# Altium PCB STRWL-P01-V01-PowerPlane.PcbDoc
Units mil, origin at the board's own origin, x right, y up, seen from the top; angles counter-clockwise.
Board outline 2615 x 3075 mil, 2 copper layers (Top Layer, Bottom Layer); 112 components, 76 nets, 407 pads, 112 vias.
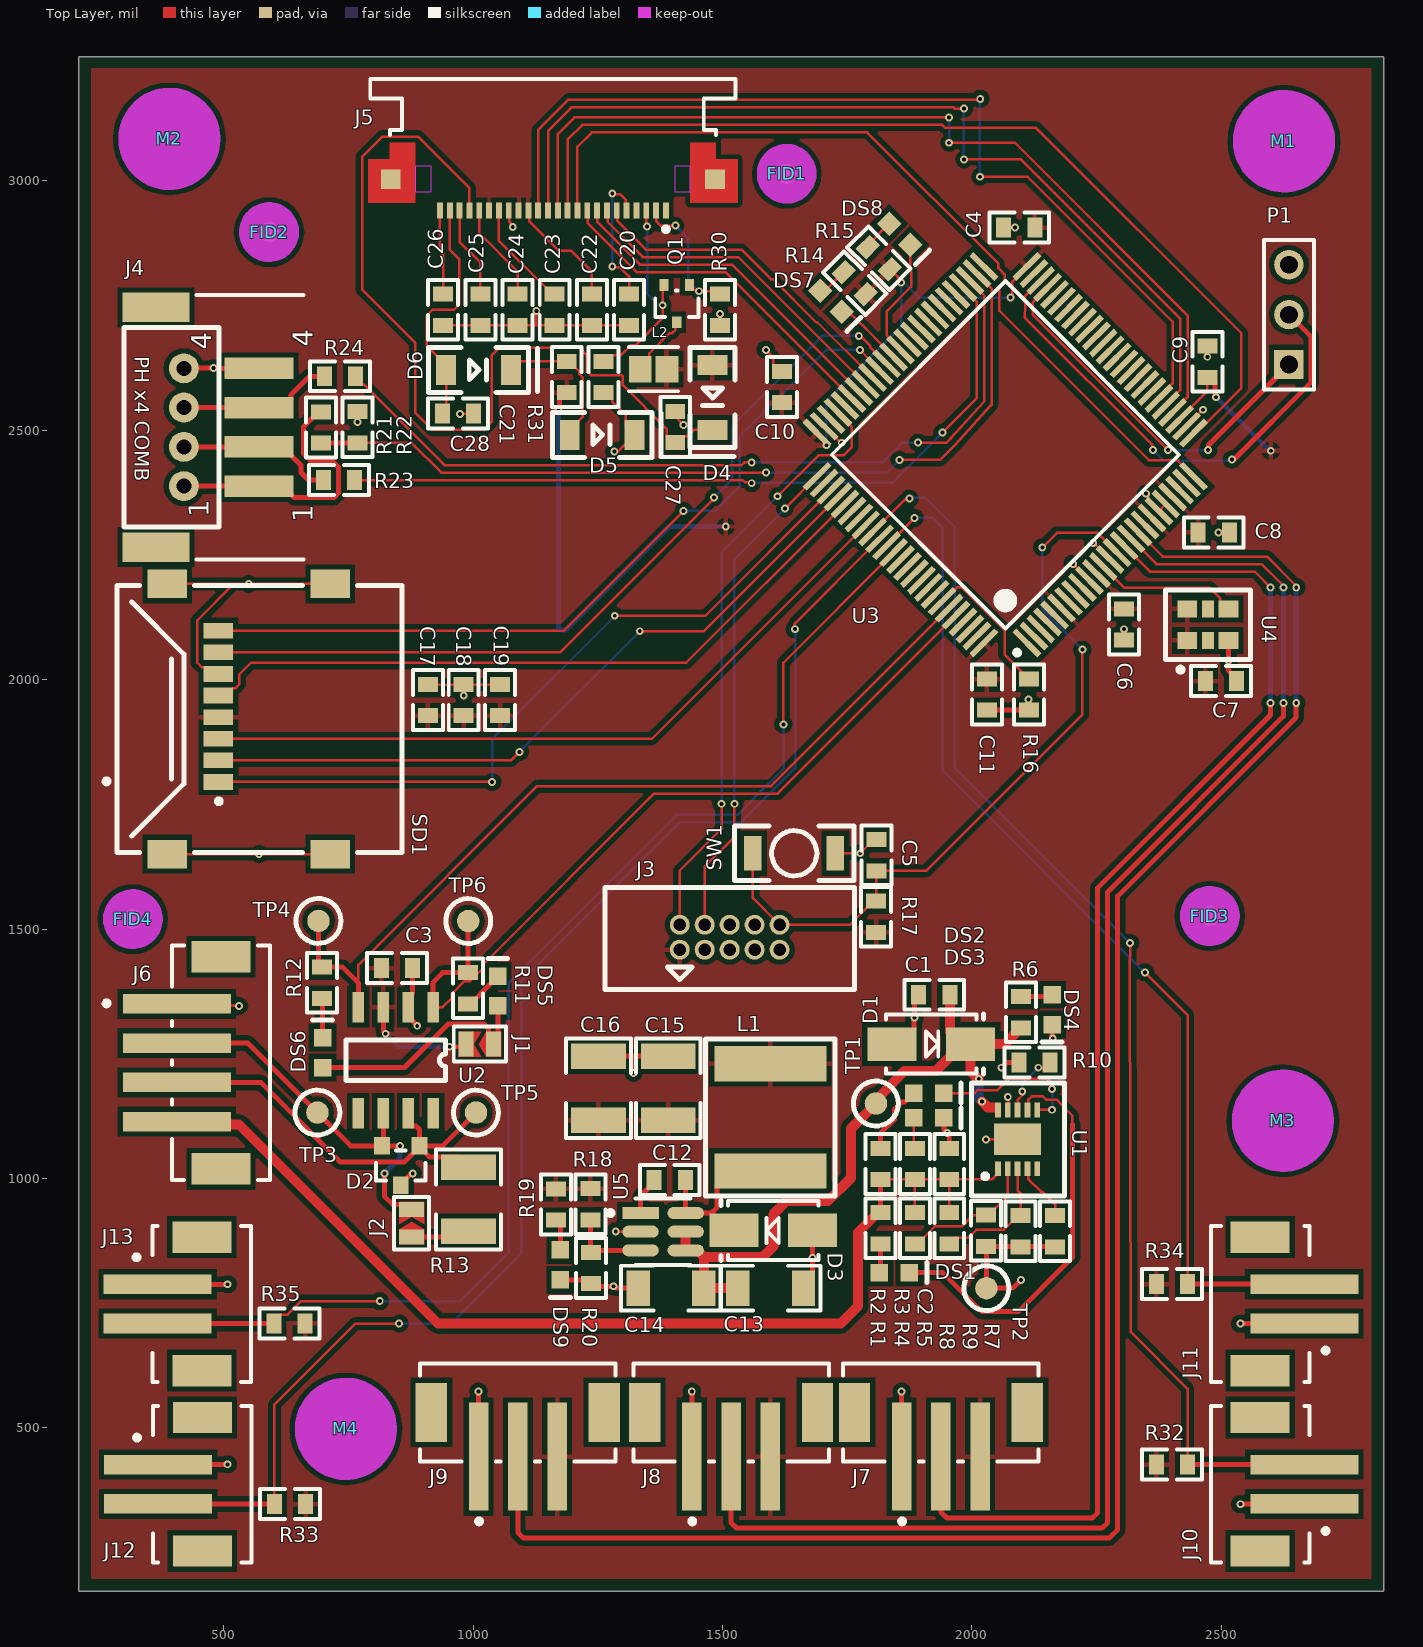
[diagram p0: Top Layer view]
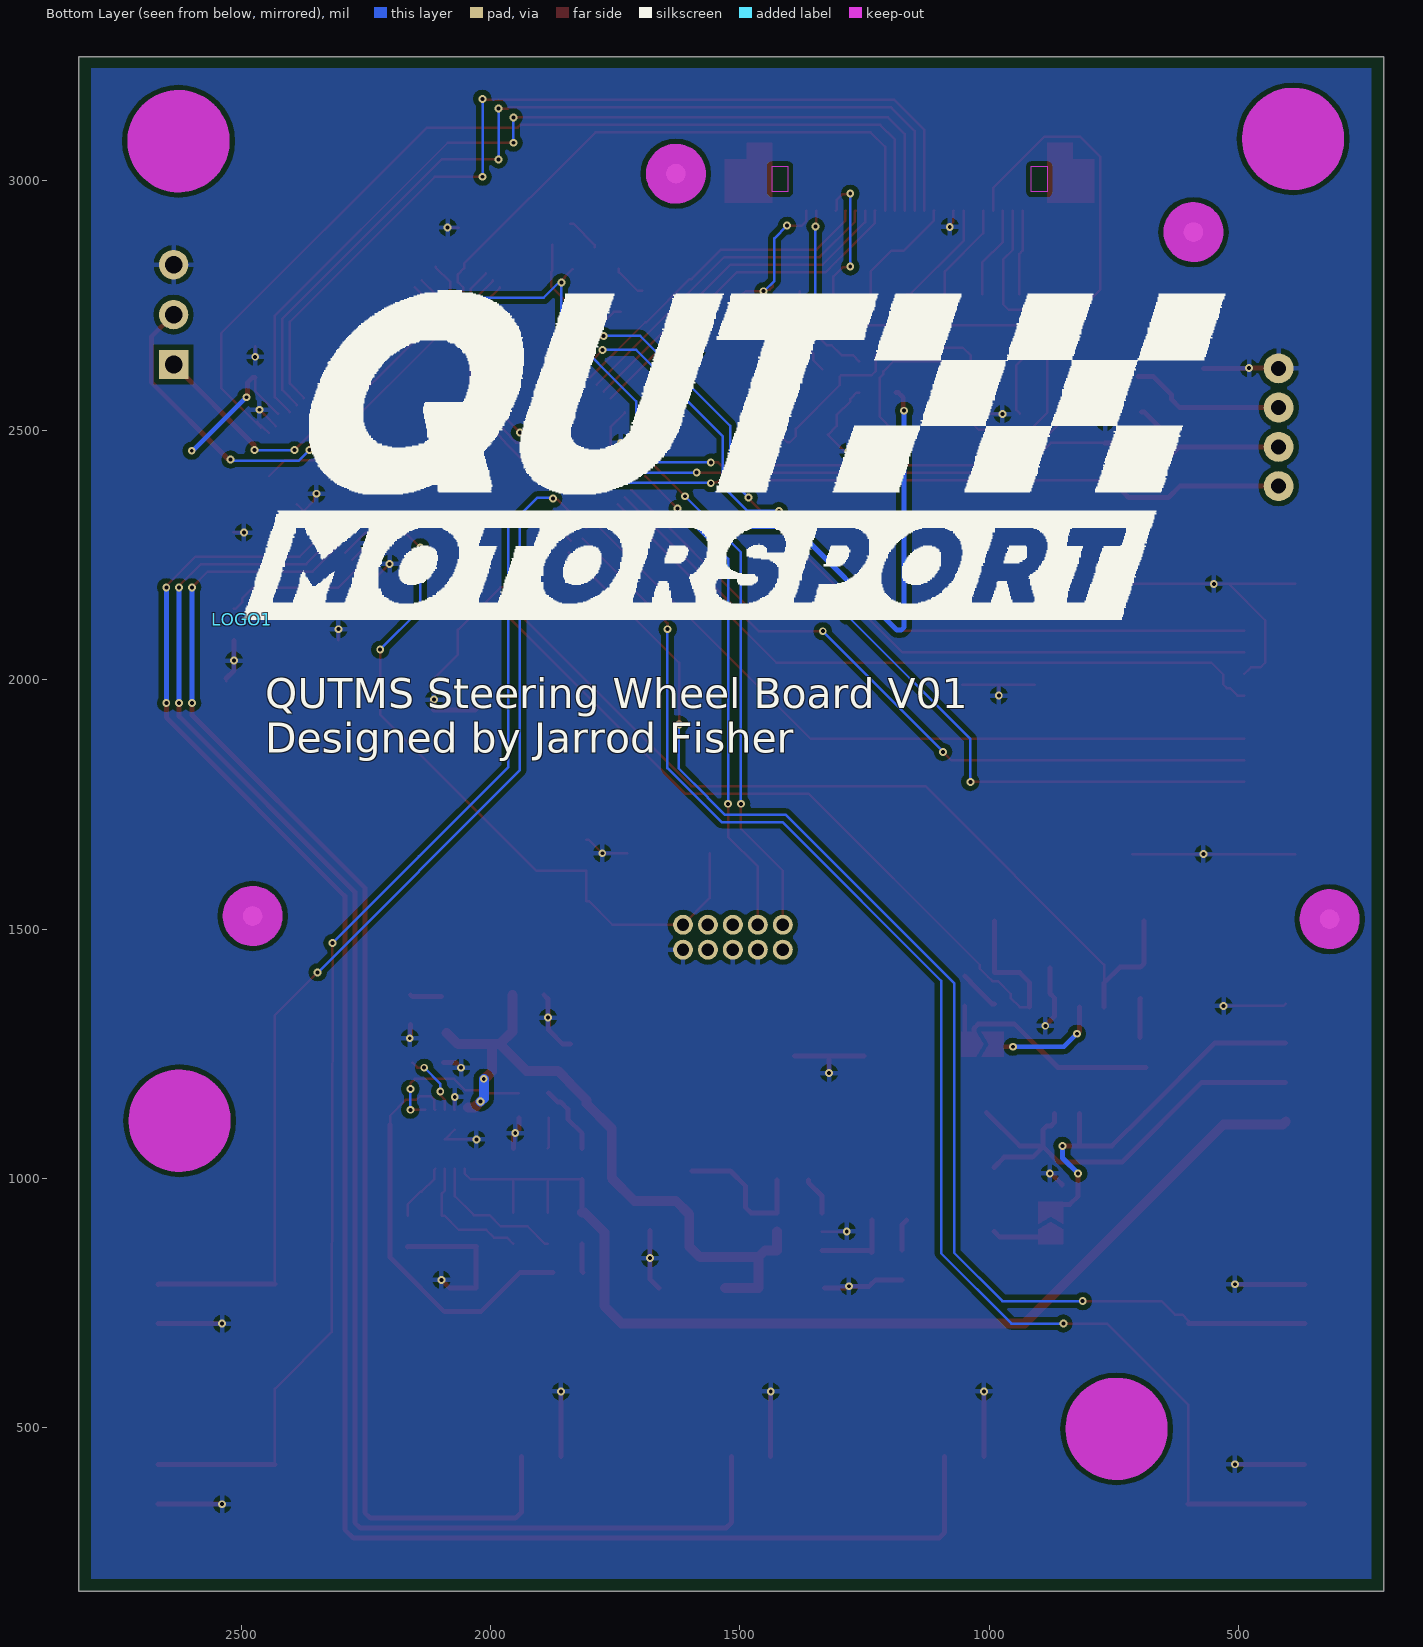
[diagram p1: Bottom Layer view, seen from below]
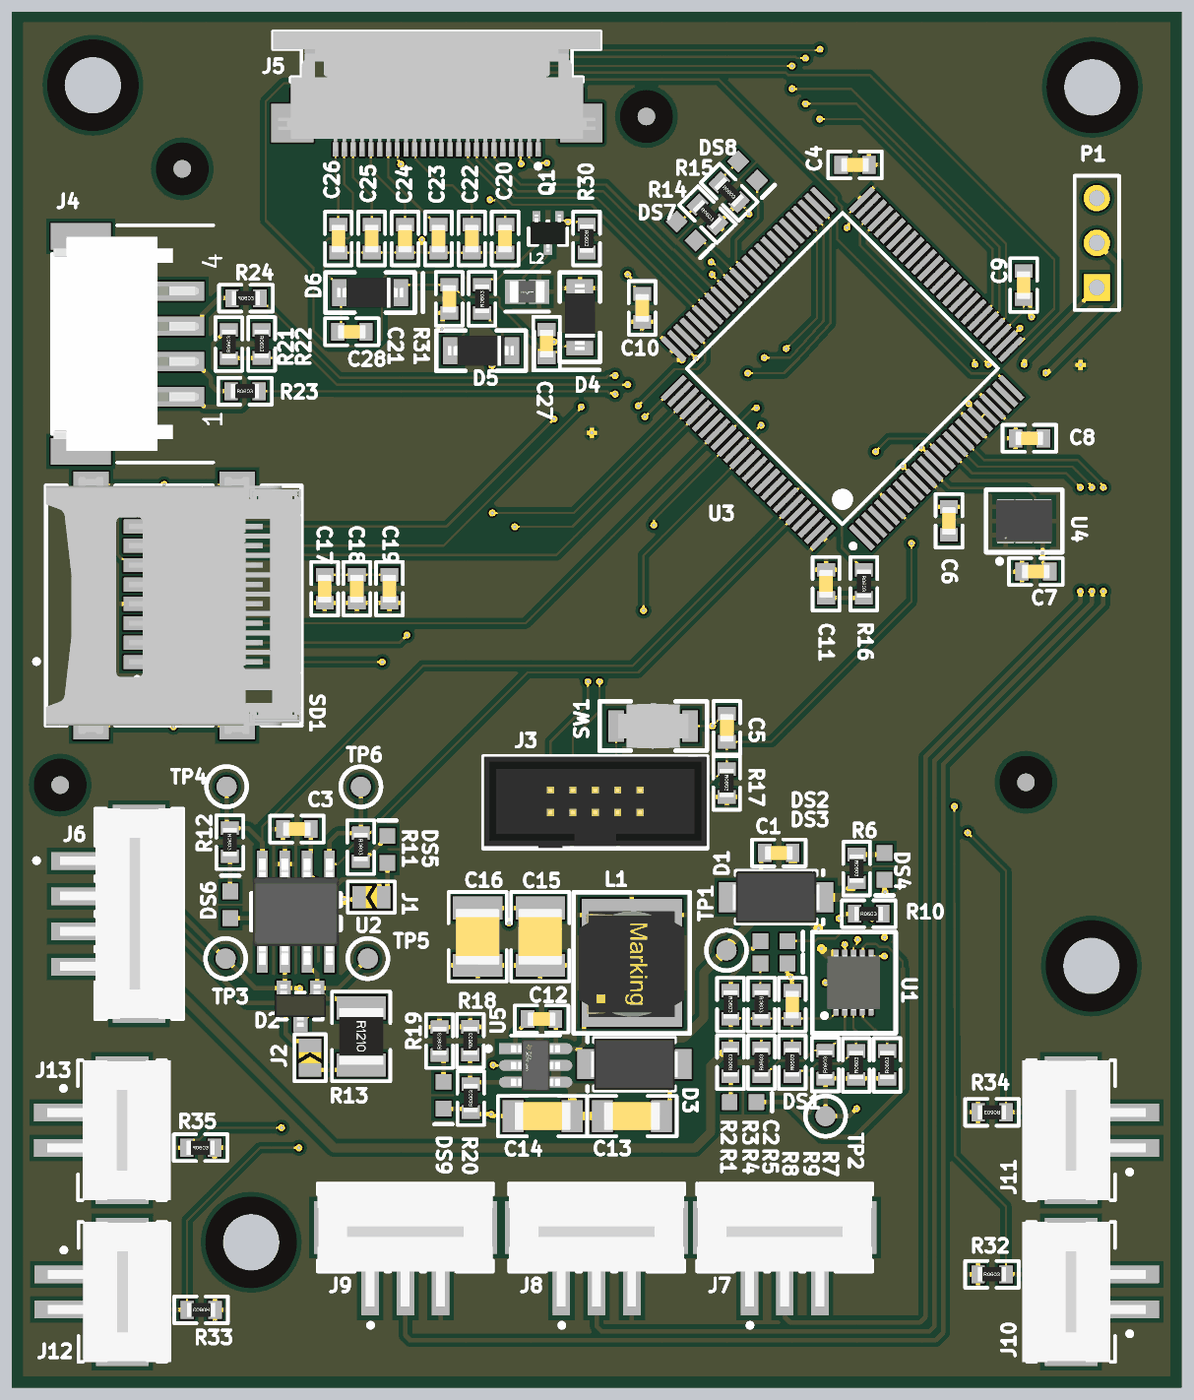
[diagram p2: 3D render of the assembled board from above, using the file's embedded part models]

## Layer stack, top to bottom
Top Solder: solder mask 0.4, Solder Resist, Dk 3.5
Top Layer: signal copper 1.4
Dielectric 1: dielectric 12.6, FR-4, Dk 4.8
Bottom Layer: signal copper 1.4
Bottom Solder: solder mask 0.4, Solder Resist, Dk 3.5

## Board outline
210,173 2825,173 2825,3248 210,3248

## Design rules (kind name [scope] priority, off if disabled: settings)
Clearance [All] p1: gap=10 ignorepadtopadclearanceinfootprint=TRUE except(0: Arc-Hole Track-Hole SMDPad-Hole THPad-Hole Via-Hole Fill-Hole Poly-Hole Region-Hole Text-Hole)
PolygonConnect [All] p1: connectstyle=Relief reliefconductorwidth=10 reliefentries=4 polygonreliefangle="90 Angle" airgapwidth=10
RoutingVias [All] p1: holewidth=7.87 width=15.75 viastyle="Through Hole" minholewidth=7.87 minwidth=15.75 maxholewidth=7.87 maxwidth=15.75
SolderMaskExpansion [All] p1: expansion=4
Width [All] p1: maxlimit=20 minlimit=5 preferedwidth=10
30 further rules are at their usual default settings.

## Classes and differential pairs
component class U_STRWL-S06-V00-Peripherals: C17 C18 C19 J4 R21 R22 R23 R24 SD1
component class U_STRWL-S05-V00-Master-PSU3V3-300mA: C12 C13 C14 C15 C16 D3 DS9 L1 R18 R19 R20 U5
component class U_STRWL-S04-V00-Microcontroller: C4 C5 C6 C7 C8 C9 C10 C11 DS7 DS8 J3 P1 R14 R15 R16 R17 SW1 U3 U4
component class U_STRWL-S03-V00-CAN_MAIN: C3 D2 DS5 DS6 J1 J2 R11 R12 R13 TP3 TP4 TP5 TP6 U2
component class U_STRWL-S02-V00-12VProtection: 2 C1 C2 D1 DS1 DS2 DS3 DS4 R1 R2 R3 R4 R5 R6 R7 R8 R9 R10 TP1 TP2 U1
component class STRWL-S01-V01-Master1: C20 C21 C22 C23 C24 C25 C26 C27 C28 D4 D5 D6 FID1 FID2 FID3 FID4 J5 J6 J7 J8 J9 J10 J11 J12 J13 L2 LOGO1 M1 M2 M3 M4 Q1 R30 R32 R33 R34 R35

## Components (designator, comment, footprint, x,y, rotation, side; value= is the part's Value field where it differs from the comment)
C1 "4u7 50V 5%" Cap_Ceramic_0603 1924.47,1368.23 r0 top
C2 "470nF 50V 5%" Cap_Ceramic_0603 1954.47,1029.23 r270 top
C3 "100nF 50V 5% X7R 0603" Cap_Ceramic_0603 847.3,1421.47 r0 top
C4 "100nF 50V 5% X7R 0603" Cap_Ceramic_0603 2094.84,2905.91 r0 top
C5 "100nF 50V 5% X7R 0603" Cap_Ceramic_0603 1808.26,1647.81 r270 top
C6 "100nF 50V 5% X7R 0603" Cap_Ceramic_0603 2304.92,2110.34 r90 top
C7 "100nF 50V 5% X7R 0603" Cap_Ceramic_0603 2499,1997 r180 top
C8 "100nF 50V 5% X7R 0603" Cap_Ceramic_0603 2484.61,2294.87 r180 top
C9 "100nF 50V 5% X7R 0603" Cap_Ceramic_0603 2471.78,2637.16 r270 top
C10 "100nF 50V 5% X7R 0603" Cap_Ceramic_0603 1619,2586.26 r270 top
C11 "4u7" Cap_Ceramic_0603 2030,1969.85 r90 top
C12 "100nF 50V 5% X7R 0603" Cap_Ceramic_0603 1394.19,997 r0 top
C13 "22uF 35V" Cap_Ceramic_1206 1596.19,780 r0 top
C14 "22uF 35V" Cap_Ceramic_1206 1396.72,780 r180 top
C15 "47uF 16V 1210" Cap_Ceramic_1210 1391.19,1181 r270 top
C16 "47uF 16V 1210" Cap_Ceramic_1210 1251.19,1181 r270 top
C17 "4u7" Cap_Ceramic_0603 909.44,1958.82 r270 top
C18 "1uF" Cap_Ceramic_0603 981.2,1958.82 r270 top
C19 "100nF 50V 5% X7R 0603" Cap_Ceramic_0603 1054.07,1958.82 r270 top
C20 "1uF 25V 5% X7R 0603" Cap_Ceramic_0603 1312.7,2741.31 r90 top
C21 "4u7 50V 5% X7R 0603" Cap_Ceramic_0603 1187.73,2606.5 r270 top
C22 "1uF 25V 5% X7R 0603" Cap_Ceramic_0603 1238.16,2741.31 r90 top
C23 "1uF 25V 5% X7R 0603" Cap_Ceramic_0603 1163.62,2741.31 r90 top
C24 "1uF 25V 5% X7R 0603" Cap_Ceramic_0603 1089.08,2741.31 r90 top
C25 "1uF 25V 5% X7R 0603" Cap_Ceramic_0603 1014.54,2741.31 r90 top
C26 "1uF 25V 5% X7R 0603" Cap_Ceramic_0603 940,2741.31 r90 top
C27 "1uF 25V 5% X7R 0603" Cap_Ceramic_0603 1405.27,2506.5 r270 top
C28 "1uF 25V 5% X7R 0603" Cap_Ceramic_0603 970,2533 r180 top
D1 "1N4448WQ-7-F" SMA 1918.47,1269.23 r0 top
D2 "NUP2105L" NUP2105L 855,1026 r180 top
D3 "B260A-13-F" SMA 1601.72,896 r180 top
D4 "STPS0530Z" SOD123 1479.78,2565.5 r270 top
D5 "STPS0530Z" SOD123 1258.73,2490.62 r0 top
D6 "STPS0530Z" SOD123 1011,2620.5 r0 top
DS1 "LED Red 0603" "LED RED 0603" 1844.47,811.23 r0 top
DS2 "LED Red 0603" "LED RED 0603" 1913.47,1171.23 r0 top
DS3 "LED Green 0603" "LED GREEN 0603" 1913.47,1121.23 r0 top
DS4 "LED Green 0603" "LED GREEN 0603" 2160.7,1338.23 r270 top
DS5 "LED Blue 0603" "LED BLUE 0603" 1049.46,1375.76 r90 top
DS6 "LED Blue 0603" "LED BLUE 0603" 698.38,1252.29 r90 top
DS7 "LED Orange" "LED ORANGE 0603" 1717.49,2758.12 r315 top
DS8 "LED Orange" "LED ORANGE 0603" 1855.1,2892.62 r315 top
DS9 "LED Green 0603" "LED GREEN 0603" 1174.96,826.76 r270 top
FID1 "Fiducial 1MM" "FIDUCIAL 1MM" 1628.5,3014.02 r0 top
FID2 "Fiducial 1MM" "FIDUCIAL 1MM" 591,2897 r90 top
FID3 "Fiducial 1MM" "FIDUCIAL 1MM" 2476.89,1526 r90 top
FID4 "Fiducial 1MM" "FIDUCIAL 1MM" 318,1519.78 r90 top
J1 "Jumper 2Way Solderable" Jumper_2Way_Solderable 1041.22,1269.37 r90 top
J2 "Jumper 2Way Solderable" Jumper_2Way_Solderable 876.73,883 r0 top
J3 "IDC 10P 2x5 1.27mm" "IDC 1.27MM 10P" 1514.23,1483.52 r0 top
J4 "JST PH 4x RIGHT COMB" "JST PH 4x RIGHT COMB" 305.28,2505.84 r90 top
J5 "52437-2471" MOLX-52437-2471 1160,2971.73 r180 top locked
J6 "JST PH 4 Way VERT SMD" "JST 4P VERT SMD" 494.58,1230.91 r270 top
J7 "JST PH 3 Way VERT SMD" "JST 3P VERT SMD" 1937.73,531.06 r0 top
J8 "JST PH 3 Way VERT SMD" "JST 3P VERT SMD" 1517.14,531.06 r0 top
J9 "JST PH 3 Way VERT SMD" "JST 3P VERT SMD" 1089.73,531.06 r0 top
J10 "JSP PH 2 Way VERT SMD" "JST 2P VERT SMD" 2627,387 r270 top
J11 "JSP PH 2 Way VERT SMD" "JST 2P VERT SMD" 2627,748.51 r270 top
J12 "JSP PH 2 Way VERT SMD" "JST 2P VERT SMD" 407.98,387 r90 top
J13 "JSP PH 2 Way VERT SMD" "JST 2P VERT SMD" 406.98,748.51 r90 top
L1 "74404064221" Inductor_6x6mm 1595.72,1120 r90 top
L2 "LQM21FN100M70L" Murata_LQM21FN_70_IPC_C 1361.93,2622.27 r180 top
LOGO1 "50mm Wide QUTMS Logo" "QUTMS LOGO 50MM" 2497.29,2120 r180 bottom
M1 "Hole M3 Tight Unplated" "M3.2 UNPLATED" 2625.36,3079.17 r0 top
M2 "Hole M3 Tight Unplated" "M3.2 UNPLATED" 391.2,3083.86 r0 top
M3 "Hole M3 Tight Unplated" "M3.2 UNPLATED" 2623.25,1115.65 r0 top
M4 "Hole M3 Tight Unplated" "M3.2 UNPLATED" 745,498 r0 top
P1 "Header 3" HDR1X3 2635.36,2631.57 r90 top
Q1 "MOSFET N-CH 30V 4A SOT323" Diodes_SOT323_0 1408.4,2753.46 r180 top
R1 "4k7 5% 0603" Res_ThinFilm_0603 1816.47,900.23 r90 top
R2 "4k7 5% 0603" Res_ThinFilm_0603 1816.47,1029.23 r270 top
R3 "4k7 5% 0603" Res_ThinFilm_0603 1885.47,1029.17 r270 top
R4 "2M2 1%" Res_ThinFilm_0603 1885.47,900.23 r90 top
R5 "2M2 1%" Res_ThinFilm_0603 1954.47,900.23 r90 top
R6 "4k7 5% 0603" Res_ThinFilm_0603 2098.47,1333.23 r270 top
R7 "150k 5% 0603" Res_ThinFilm_0603 2166.47,894.23 r90 top
R8 "390k 5%" Res_ThinFilm_0603 2028.47,895.23 r90 top
R9 "240k 5%" Res_ThinFilm_0603 2097.47,894.23 r90 top
R10 "1k 5% 0603" Res_ThinFilm_0603 2125.47,1232.23 r0 top
R11 "330R" Res_ThinFilm_0603 990,1381.24 r270 top
R12 "330R" Res_ThinFilm_0603 697.19,1392.24 r270 top
R13 "120R 1% 1210" Res_ThinFilm_1210 991,958 r270 top
R14 "330R" Res_ThinFilm_0603 1764.97,2794.88 r315 top
R15 "330R" Res_ThinFilm_0603 1813.5,2844.77 r315 top
R16 "10k 1% 0603" Res_ThinFilm_0603 2114.56,1969.85 r270 top
R17 "4k7" Res_ThinFilm_0603 1808.02,1524.52 r270 top
R18 "64k9 1%" Res_ThinFilm_0603 1234.96,948.24 r90 top
R19 "1k" Res_ThinFilm_0603 1165.96,947.87 r90 top
R20 "19k6 1%" Res_ThinFilm_0603 1235.96,820.24 r90 top
R21 "10k 5% 0603" Res_ThinFilm_0603 695,2505.5 r90 top
R22 "15k 5% 0603" Res_ThinFilm_0603 768.47,2505.76 r270 top
R23 "22R" Res_ThinFilm_0603 731.24,2400 r0 top
R24 "22R" Res_ThinFilm_0603 733.24,2608 r0 top
R30 "10k 1% 0603" Res_ThinFilm_0603 1494.78,2741.31 r270 top
R31 "0R47 5% 0603" Res_ThinFilm_0603 1261.11,2606.5 r90 top
R32 "10k 5% 0603" Res_ThinFilm_0603 2401,426.37 r0 top
R33 "10k 5% 0603" Res_ThinFilm_0603 633,347 r180 top
R34 "10k 5% 0603" Res_ThinFilm_0603 2401,788.39 r180 top
R35 "10k 5% 0603" Res_ThinFilm_0603 632,709.51 r0 top
SD1 "47219-2001" 47219-2001 550.25,1921 r90 top
SW1 "B3U-1000P" "BTN B3U-1000P" 1643.66,1651.81 r180 top
TP1 "TestPoint" TestPointSMD 1807.47,1150.23 r270 top
TP2 "TestPoint" TestPointSMD 2028.92,779.99 r90 top
TP3 "TestPoint_SMD" TestPointSMD 687.93,1132 r90 top
TP4 "TestPoint_SMD" TestPointSMD 690.1,1516.29 r90 top
TP5 "TestPoint_SMD" TestPointSMD 1005.86,1132 r90 top
TP6 "TestPoint_SMD" TestPointSMD 990.19,1516 r90 top
U1 "MAX17612A" MAX17612A 2091.47,1078.23 r90 top
U2 "SN65HVD233" SN65HVD233DR 845,1237 r270 top
U3 "STM32F207VGT7" STM-LQFP100_N 2066.9,2450.74 r135 top
U4 "DSC1101CI5-020.0000T" VDFN6_3P2X2P5_MCH 2473,2110 r90 top
U5 "LMR14010ADDCR" Texas_Instruments_DDC0006A_IPC_A 1380.96,893.24 r0 top

## Footprints (in the part's own frame and the unit in brackets; to place one, negate y for a bottom-side part, rotate by r counter-clockwise, add the part's x,y. Pads: shape width x height; smd on the part's side, far side on the other; paste and mask are expansions set on the pad)
47219-2001 [mm]
  rect 0.8x1.5 smd: 1(-3.205,1.55) 2(-2.105,1.55) 3(-1.005,1.55) 4(0.095,1.55) 5(1.195,1.55) 6(2.295,1.55) 7(3.395,1.55) 8(4.495,1.55)
  rect 1.45x2 smd: 9(6.875,4.15) 10(6.875,-4.15) 11(-6.875,-4.15) 12(-6.875,4.15)
  silkscreen extent -6.8,-7.8 6.8,7.36, body extent -7.3,-7.79 7.3,6.71, height 1.91
"BTN B3U-1000P" [mil] "OMRON B3U-1000P"
  rect 35x70 smd: 1(-82.68,0) 2(82.68,0)
  silkscreen extent -120,-55 120,55, body extent -79,-49 79,49, height 63
Cap_Ceramic_0603 [mil]
  rect 30x40 smd: 1(-31.24,0) 2(31.24,0)
  silkscreen extent -60,-30 60,30, body extent -31,-16 32,16, height 33
Cap_Ceramic_1206 [mil]
  rect 47x71 smd: 1(-66.08,0) 2(66.08,0)
  silkscreen extent -100,-45 100,45, body extent -63,-31 63,32, height 53
Cap_Ceramic_1210 [mm]
  rect 1.3x2.8 smd: 1(-1.625,0) 2(1.625,0)
  silkscreen extent -2.54,-1.65 2.54,1.65, body extent -1.6,-1.25 1.6,1.25, height 1.35
Diodes_SOT323_0 [mm]
  rect 0.47x0.6 smd paste+0 mask+0: 1(0,0.95) 2(-0.65,-0.95) 3(0.65,-0.95)
  silkscreen extent -1.1,-0.67 1.1,0.67, body extent -1.35,-1.2 1.35,1.2, height 0.25
"FIDUCIAL 1MM" [mm]
  round 1 smd mask+1: 1(0,0)
  round 1 smd far side mask+1: 1(0,0)
  Keep-Out Layer circle w1.524: c0,0 r0.762
HDR1X3 [mm] "Connector; Header; 3 Position"
  rect 1.5x1.5 hole 0.9: 1(0,0)
  round 1.5 hole 0.9: 2(2.54,0) 3(5.08,0)
  silkscreen extent -1.27,-1.27 6.35,1.27
"IDC 1.27MM 10P" [mil]
  round 40 hole 25: 1(-100,-25) 2(-100,25) 3(-50,-25) 4(-50,25) 5(0,-25) 6(0,25) 7(50,-25) 8(50,25) 9(100,-25) 10(100,25)
  silkscreen extent -250,-105 250,100, body extent -249,-104 249,100, height 214
Inductor_6x6mm [mm]
  rect 1.8x5.7 smd: 1(-2.667,0) 2(2.794,0)
  silkscreen extent -3.94,-3.3 4.06,3.3, body extent -3,-3 3,3, height 4.56
"JST 2P VERT SMD" [mm]
  rect 1x5.5 smd paste+0 mask+0: 1(1,1) 2(-1,1)
  rect 1.6x3 smd paste+0 mask+0: 3(3.4,-1.25) 4(-3.4,-1.25)
  silkscreen extent -3.98,-3.75 3.98,2.2, body extent -4.3,-3.85 4.3,3.85, height 0.25
"JST 3P VERT SMD" [mm]
  rect 1x5.5 smd paste+0 mask+0: 1(-2,-2.25) 2(0,-2.25) 3(2,-2.25)
  rect 1.6x3 smd paste+0 mask+0: 4(-4.4,0) 5(4.4,0)
  silkscreen extent -4.97,-5.67 4.97,2.5, body extent -5.3,-5.1 5.3,2.6, height 0.25
"JST 4P VERT SMD" [mm]
  rect 1x5.5 smd paste+0 mask+0: 1(-3.025,-2.25) 2(-1.025,-2.25) 3(0.975,-2.25) 4(2.975,-2.25)
  rect 1.6x3 smd paste+0 mask+0: 5(-5.425,0) 6(5.375,0)
  silkscreen extent -6,-5.95 5.95,2.5, body extent -6.32,-5.1 6.27,2.6, height 0.25
"JST PH 4x RIGHT COMB" [mm]
  round 1.524 hole 0.762: 1(-3,-2.921) 2(-1,-2.921) 3(1,-2.921) 4(3,-2.921)
  rect 1.1x3.5 smd: 1(-3,-6.75) 2(-1,-6.75) 3(1,-6.75) 4(3,-6.75)
  rect 1.5x3.4 smd: M(-6.1,-1.5) M(6.1,-1.5)
  silkscreen extent -6.73,-9.02 6.73,0.13, body extent -6.07,-8.2 6.07,0.06, height 5.89
Jumper_2Way_Solderable [mil]
  rect 50x30 smd: 1(0,55) 2(0,0)
  Top Layer region: -25,15 0,30 25,15 25,-15 0,-15 -25,-15
  Top Layer region: -25,25 0,40 25,25 25,70 -25,70
  silkscreen extent -35,-25 35,80
"LED BLUE 0603" [mil]
  rect 35x35 smd: 1(-30,0) 2(30,0)
  silkscreen extent 65,-20 65,20, body extent -40,-20 40,20, height 30
"LED GREEN 0603" [mil]
  rect 35x35 smd: 1(-30,0) 2(30,0)
  silkscreen extent 65,-20 65,20, body extent -40,-20 40,20, height 30
"LED ORANGE 0603" [mil]
  rect 35x35 smd: 1(-30,0) 2(30,0)
  silkscreen extent 65,-20 65,20, body extent -40,-20 40,20, height 30
"LED RED 0603" [mil]
  rect 35x35 smd: 1(-30,0) 2(30,0)
  silkscreen extent 65,-20 65,20, body extent -40,-20 40,20, height 30
"M3.2 UNPLATED" [mm]
  round 0 hole 3.2 unplated mask+2.6: 1(0,0)
  Keep-Out Layer circle w2.667: c0,0 r1.27
MAX17612A [mm]
  rect 0.75x0.3 smd: 1(-1.5,1) 2(-1.5,0.5) 3(-1.5,0) 4(-1.5,-0.5) 5(-1.5,-1) 6(1.5,-1) 7(1.5,-0.5) 8(1.5,0) 9(1.5,0.5) 10(1.5,1)
  rect 1.6x2.4 smd: 11(0,0)
  silkscreen extent -2.87,-2.4 2.87,2.35, body extent -1.55,-1.5 1.55,1.5, height 0.8
MOLX-52437-2471 [mm] "FPC Connector, 24-Leads, Right Angle, Pitch 0.5 mm, SMT"
  rect 0.3x0.8 smd: 1(-5.75,0.8) 2(-5.25,0.8) 3(-4.75,0.8) 4(-4.25,0.8) 5(-3.75,0.8) 6(-3.25,0.8) 7(-2.75,0.8) 8(-2.25,0.8) 9(-1.75,0.8) 10(-1.25,0.8) 11(-0.75,0.8) 12(-0.25,0.8) 13(0.25,0.8) 14(0.75,0.8) 15(1.25,0.8) 16(1.75,0.8) 17(2.25,0.8) 18(2.75,0.8) 19(3.25,0.8) 20(3.75,0.8) 21(4.25,0.8) 22(4.75,0.8) 23(5.25,0.8) 24(5.75,0.8)
  rect 1x1 smd: MP1(-8.25,-0.8) MP2(8.25,-0.8)
  Top Layer region: -7,0.4 -9.4,0.4 -9.4,-1.8 -8.3,-1.8 -8.3,-2.65 -7,-2.65
  Top Layer region: 7,0.4 9.4,0.4 9.4,-1.8 8.3,-1.8 8.3,-2.65 7,-2.65
  Keep-Out Layer region: -6.2,-0.15 -7,-0.15 -7,-1.45 -6.2,-1.45
  Keep-Out Layer region: 6.2,-1.45 7,-1.45 7,-0.15 6.2,-0.15
  silkscreen extent -9.3,-5.9 9.3,1.87, body extent -9.3,-5.9 9.3,0.9, height 2.05
Murata_LQM21FN_70_IPC_C [mil]
  rect 45.45x53.39 smd paste+0 mask+0: 1(-26.61,0) 2(26.61,0)
  silkscreen extent -49,-44 49,44, body extent -53,-32 53,32, height 10
NUP2105L [mm]
  rect 0.8x0.9 smd: 1(-0.95,-1) 2(0.95,-1) 3(0,1)
  silkscreen extent -1.27,-0.76 1.27,0.76, body extent -1.45,-1.22 1.45,1.18, height 1
"QUTMS LOGO 50MM" [mil]
  silkscreen extent 0,0 1970,660
Res_ThinFilm_0603 [mil]
  rect 30x40 smd: 1(-31.24,0) 2(31.24,0)
  silkscreen extent -60,-30 60,30, body extent -31,-16 32,16, height 18
Res_ThinFilm_1210 [mm]
  rect 1.3x2.8 smd: 1(-1.625,0) 2(1.625,0)
  silkscreen extent -2.54,-1.65 2.54,1.65, body extent -1.6,-1.25 1.6,1.25, height 0.6
SMA [mm]
  rect 2.5x1.7 smd: A(-2,0) K(2,0)
  silkscreen extent -2.3,-1.52 2.67,1.52, body extent -2.52,-1.46 2.52,1.46, height 2.4
SN65HVD233DR [mm]
  rect 1.55x0.6 smd: 1(-2.7,1.903) 2(-2.7,0.633) 3(-2.7,-0.637) 4(-2.7,-1.907) 5(2.7,-1.907) 6(2.7,-0.637) 7(2.7,0.633) 8(2.7,1.903)
  silkscreen extent -1.04,-2.54 1.04,2.54, body extent -3.01,-2.45 3.01,2.45, height 1.63
SOD123 [mil]
  rect 40x60 smd: A(-65,0) K(65,0)
  silkscreen extent -100,-45 118,45, body extent -74,-33 74,33, height 47
STM-LQFP100_N [mm] "Thin QFP, 100-Leads, Body 14x14mm, Pitch 0.5mm, IPC Medium Density"
  rect 1.8x0.3 smd: 1(-7.55,6) 2(-7.55,5.5) 3(-7.55,5) 4(-7.55,4.5) 5(-7.55,4) 6(-7.55,3.5) 7(-7.55,3) 8(-7.55,2.5) 9(-7.55,2) 10(-7.55,1.5) 11(-7.55,1) 12(-7.55,0.5) 13(-7.55,0) 14(-7.55,-0.5) 15(-7.55,-1) 16(-7.55,-1.5) 17(-7.55,-2) 18(-7.55,-2.5) 19(-7.55,-3) 20(-7.55,-3.5) 21(-7.55,-4) 22(-7.55,-4.5) 23(-7.55,-5) 24(-7.55,-5.5) 25(-7.55,-6) 51(7.55,-6) 52(7.55,-5.5) 53(7.55,-5) 54(7.55,-4.5) 55(7.55,-4) 56(7.55,-3.5) 57(7.55,-3) 58(7.55,-2.5) 59(7.55,-2) 60(7.55,-1.5) 61(7.55,-1) 62(7.55,-0.5) 63(7.55,0) 64(7.55,0.5) 65(7.55,1) 66(7.55,1.5) 67(7.55,2) 68(7.55,2.5) 69(7.55,3) 70(7.55,3.5) 71(7.55,4) 72(7.55,4.5) 73(7.55,5) 74(7.55,5.5) 75(7.55,6)
  rect 0.3x1.8 smd: 26(-6,-7.55) 27(-5.5,-7.55) 28(-5,-7.55) 29(-4.5,-7.55) 30(-4,-7.55) 31(-3.5,-7.55) 32(-3,-7.55) 33(-2.5,-7.55) 34(-2,-7.55) 35(-1.5,-7.55) 36(-1,-7.55) 37(-0.5,-7.55) 38(0,-7.55) 39(0.5,-7.55) 40(1,-7.55) 41(1.5,-7.55) 42(2,-7.55) 43(2.5,-7.55) 44(3,-7.55) 45(3.5,-7.55) 46(4,-7.55) 47(4.5,-7.55) 48(5,-7.55) 49(5.5,-7.55) 50(6,-7.55) 76(6,7.55) 77(5.5,7.55) 78(5,7.55) 79(4.5,7.55) 80(4,7.55) 81(3.5,7.55) 82(3,7.55) 83(2.5,7.55) 84(2,7.55) 85(1.5,7.55) 86(1,7.55) 87(0.5,7.55) 88(0,7.55) 89(-0.5,7.55) 90(-1,7.55) 91(-1.5,7.55) 92(-2,7.55) 93(-2.5,7.55) 94(-3,7.55) 95(-3.5,7.55) 96(-4,7.55) 97(-4.5,7.55) 98(-5,7.55) 99(-5.5,7.55) 100(-6,7.55)
  silkscreen extent -7.67,-6.25 6.25,6.82, body extent -7,-7 7,7, height 1.6
TestPointSMD [mil]
  round 45 smd: 1(0,0)
  silkscreen extent -45,-45 45,45
Texas_Instruments_DDC0006A_IPC_A [mm]
  rect 1.854x0.612 smd paste+0 mask+0: 1(-1.15,0.95)
  rrect100% 1.854x0.612 smd paste+0 mask+0: 2(-1.15,0) 3(-1.15,-0.95) 4(1.15,-0.95) 5(1.15,0) 6(1.15,0.95)
  silkscreen extent -2.8,-1.7 1.4,1.7, body extent -2.58,-1.95 2.58,1.95, height 0.25
VDFN6_3P2X2P5_MCH [mm]
  rect 0.85x1 smd paste-0.425 mask+0: 1(-0.8,1.05) 3(-0.8,-1.05) 4(0.8,-1.05) 6(0.8,1.05)
  rect 0.85x0.6 smd paste+0 mask+0: 2(-0.8,0) 5(0.8,0)
  silkscreen extent -2.41,-2.16 1.78,2.16, body extent -1.25,-1.6 1.25,1.6, height 0.65

## Part data
C1 C11 C17: library part "4u7 50V 5% X7R 0603", "Capacitor, Ceramic, SMD, 4u7, 50V, 5%, X7R, 0603"
C2: library part "470nF 50V 5% X7R 0603", "Capacitor, Ceramic, SMD, 470nF, 50V, 5%, X7R, 0603"
C3 C4 C5 C6 C7 C8 C9 C10 C12 C19: "Capacitor, Ceramic, SMD, 100nF, 50V, 5%, X7R, 0603"
C13 C14: library part "22uF 35V 20% X5R 1206", "22µF ±20% 35V Ceramic Capacitor X5R 1206 (3216 Metric)", ComponentLink1Description=Digikey, ComponentLink1URL=https://www.digikey.com.au/product-detail/en/tdk-corporation/C3216X5R1V226M160AC/445-8045-1-ND/2792165, ComponentLink2Description=Datasheet, ComponentLink2URL=https://product.tdk.com/info/en/catalog/datasheets/mlcc_commercial_general_en.pdf
C15 C16: library part "47uF 16V 10% X7R 1210", "Capacitor, Ceramic, SMD, 47uF, 16V, 5%, X7R, 1210"
C18: library part "1uF 25V 5% X7R 0603", "Capacitor, Ceramic, SMD, 1uF, 25V, 5%, X7R, 0603"
C20 C22 C23 C24 C25 C26 C27 C28: "Capacitor, Ceramic, SMD, 1uF, 25V, 5%, X7R, 0603"
C21: "Capacitor, Ceramic, SMD, 4u7, 50V, 5%, X7R, 0603"
D1: "Diode, SMD, 75V, 5%, 250mA, SOD123", Average Rectified Current=150mA, Forward Voltage=1V, Manufacturer="ON Semiconductor / Fairchild", Manufacturer Part Number=1N914BWS, Max Forward Surge Current (Ifsm)=4A, Max Operating Temperature=150°C, Max Repetitive Reverse Voltage (Vrrm)=75V, Max Reverse Leakage Current=5uA, Min Operating Temperature=-55°C, Package Quantity=1, Power Dissipation=200mW, Category="Rectifier Diodes", Contact Plating=Tin,Matte, Element Configuration=Single, Forward Current=150mA, Height=1mm, Lead Free="Lead Free", Length=1.8mm, Max Reverse Voltage (DC)=75V, Mount="Surface Mount", Number of Pins=2, Packaging="Tape and Reel", Peak Reverse Current=5uA, Radiation Hardening=No, REACH SVHC="No SVHC", Recovery Time=4ns, Reverse Recovery Time=4ns, Reverse Voltage=75V, Weight=0.0276g, Width=1.35mm
D3: "Diode, Schottky Barrier Rectifier, 60 V, 2 A, B260A-13-F"
D4 D5 D6: "Diode, Schottky Barrier Rectifier, 30 V, 0.5 A, STPS0530Z"
DS5 DS6: library part "LED BLUE 0603"
DS7 DS8: library part "LED ORANGE 0603"
J1 J2: library part "Jumper 2Way Side Solderable", "Jumper 2Way Side Solderable"
J5: "0.5 mm Pitch Easy-On(TM) Type FPC Connector, Right Angle, ZIF, SMT, Bottom Contact, 24 Circuits, -40 to 85 degC, ELV and RoHS Compliant, Tape and Reel", Current (Max per Contact)=0.5A, Manufacturer=Molex, Voltage (Max)=50V, Circuits (Loaded)=24, ComponentLink1Description="Manufacturer URL", ComponentLink1URL=http://www.molex.com/molex/index.jsp, ComponentLink2Description=Datasheet, ComponentLink2URL=http://www.molex.com/webdocs/datasheets/pdf/en-us/0524372471_FFC_FPC_CONNECTORS.pdf, ComponentLink3Description="Package Specification", ComponentLink3URL=http://www.molex.com/pdm_docs/sd/524372471_sd.pdf, Contact Position=Bottom, Durability (mating cycles max)=20, Entry Angle="90degrees Angle", Material - Metal="Phosphor Bronze", Material - Plating Mating=Gold, Material - Plating Termination=Gold, Mounting Technology="Surface Mount", Number of Rows=1, Orientation="Right Angle", PackageDescription="24-Lead FPC Connector, Pitch 0.5 mm", PackageReference=52437-2471, PackageVersion="Rev. E, 07/2013", Packing="Tape and Reel", PartNumber=52437-2471, PCB Locator=No, PCB Retention=None, Pitch - Mating Interface=0.50mm, Polarized to PCB=Yes, RoHS=TRUE, Stackable=No
J10 J11 J12 J13: color=White, current_rating="2 A", Digikey Part Number=455-1734-1-ND, flammability_rating="UL 94 V-0", housing_color=Natural, insulation_resistance="1 GO", Manufacturer=JST, Package=CONN_SMT_7MM95_5MM0, Temperature="-25°C to +85°C", Temperature Range High=+85°C, Temperature Range Low=-25°C, voltage_rating_ac="100 V", Category 75Fab8F04590Ae3D="Connectors and Adapters", Category 0836C53C3D42D3F1=Connectors, Category A3C16Ecb93907806=Uncategorized, Category Bda670Ac885E6661=Uncategorized, Category Dab617Bcef8C0171="PC Board", Category E42C2926D3763Feb="Wire to Board", Category E7012A0Bd22E3Cc6="Headers & Receptacles", Category Fcf631Fcc9332731=Uncategorized, ComponentLink1Description=Upverter, ComponentLink1URL=https://upverter.com/upn/revision/aa2260f5f3c02952/, ComponentLink2Description=Datasheet, ComponentLink2URL=https://upverter.com/datasheet/05f4473ffc638d76a3bb68900fd4324175be47ba.pdf, contact_material=Brass, contact_plating=Tin, Digikey Description="CONN 2 Positions Header, Shrouded Connector 0.079\" (2.00mm) Surface Mount Tin", gender=Female, helpURL=https://upverter.com/upn/revision/aa2260f5f3c02952/, housing_material=Nylon, Lead Free=yes, Mounting Type="surface mount", Num Pins=2, number_of_contacts=2, number_of_positions=2, number_of_rows=1, pin_pitch="2 mm", Price=0.401172514632, RoHS=TRUE, size_height="6.6 mm", size_length="7.95 mm", size_width="5 mm", Supplier 1=Digi-Key, Supplier 2=Mouser, Supplier Part Number 1=455-1734-1-ND
L1: "FIXED IND 220UH 660MA 850 MOHM", ComponentLink1Description=Digikey, ComponentLink1URL=https://www.digikey.com.au/product-detail/en/w%C3%BCrth-elektronik/74404064221/732-7261-1-ND/5353241, ComponentLink2Description="LCSC A", ComponentLink2URL=https://lcsc.com/product-detail/Power-Inductors_Sunlord-SWPA6045S221MT_C91047.html, ComponentLink3Description="LCSC B", ComponentLink3URL=https://lcsc.com/product-detail/Power-Inductors_SXN-Shun-Xiang-Nuo-Elec-SMNR6045-221MT_C467145.html
LOGO1: library part "QUTMS Logo 50mm"
M1 M2 M3 M4: "M3.2 Hole, No Plating"
P1: "Header, 3-Pin", LatestRevisionDate=17-Jul-2002, LatestRevisionNote="Re-released for DXP Platform.", Publisher="Altium Limited"
Q1: library part DMN3065LW-13, "N-Channel 30V 4A (Ta) 770mW (Ta) Surface Mount SOT-323"
R1 R2 R3 R6: "Resistor, SMD, 4k7, 0.1W, 5%, 0603"
R4 R5: library part "2M2 1% 0603", "Resistor, SMD, 2M2, 0.125W, 1%, 0603"
R7: library part "150k 5%, 0603", "Resistor, SMD, 150k, 0.1W, 5%, 0603"
R8: library part "390k 5% 0603", "Resistor, SMD, 390k, 0.1W, 5%, 0603"
R9: library part "240k 5% 0603", "Resistor, SMD, 240k, 0.1W, 5%, 0603"
R10: "Resistor, SMD, 1k, 0.1W, 5%, 0603"
R11 R12 R14 R15: library part "330R 5% 0603", "Resistor, SMD, 330R, 0.1W, 5%, 0603"
R13: "Resistor, SMD, 120R, 0.25W, 1%, 1210"
R16: library part "20k 1% 0603", "Resistor, SMD, 20k, 0.1W, 5%, 0603"
R17: library part "4k7 5% 0603", "Resistor, SMD, 4k7, 0.1W, 5%, 0603"
R18: library part "64k9 1% 0603", "Resistor, SMD, 64k9, 0.1W, 5%, 0603"
R19: library part "1k 5% 0603", "Resistor, SMD, 1k, 0.1W, 5%, 0603"
R20: library part "19k6 1% 0603", "Resistor, SMD, 19k6, 0.1W, 5%, 0603"
R21 R32 R33 R34 R35: "Resistor, SMD, 10k, 0.1W, 5%, 0603"
R22: "Resistor, SMD, 15k, 0.1W, 5%, 0603"
R23 R24: library part "22R 1% 0603", "Resistor, SMD, 22R, 0.1W, 1%, 0603"
R30: "Resistor, SMD, 10k, 0.1W, 1%, 0603"
R31: library part "0R47 5% 0603_1", "Resistor, SMD, 0R, 0.1W, 5%, 0603"
SD1: "MicroSD Card Connector, Hinge Type, -40 to 85 degC, 8-Pin SMD, RoHS, Tape and Reel"
SW1: library part "BTN B3U-1000P", "Omron B3U-1000P Ultra Miniture Switch", ComponentLink1Description=LCSC, ComponentLink1URL=https://lcsc.com/product-detail/Tactile-Switches_BRIGHT-TSA063G50-250_C294565.html
U1: "4.5V to 60V, 250mA Current-Limiter with OV, UV, and Reverse Protection", ComponentLink1Description=Datasheet, ComponentLink1URL=https://datasheets.maximintegrated.com/en/ds/MAX17612A-MAX17612C.pdf
U3: library part STM32F207VGT7-Custom, "ARM Cortex-M3 32-bit MCU, 1024 KB Flash, 128 KB Internal RAM, 82 I/Os, 100-pin LQFP, -40 to 105 degC, Tray", I/Os (High Current)=82, Operating Frequency(F) (Processor speed) (MHz)=120, Supply Voltage(Vcc) min (V)=1.8, ComponentLink1Description="Manufacturer URL", ComponentLink1URL=http://www.st.com/web/en/home.html, ComponentLink2Description=Datasheet, ComponentLink2URL=http://www.st.com/st-web-ui/static/active/en/resource/technical/document/datasheet/CD00237391.pdf, ComponentLink3Description="Package Specification", ComponentLink3URL=http://www.st.com/st-web-ui/static/active/en/resource/technical/document/data_brief/DM00071938.pdf, Core="ARM Cortex-M3", D/A Converter="2x12-bit (2 Channel)", DatasheetVersion="Rev. 9", FLASH Size (Prog) (kB)=1024, Internal RAM Size (kB)=128, Mounting Technology="Surface Mount", PackageDescription="100-Pin Low Profile Quad Flat Package, 14 x 14 mm Body, 0.5 mm Pitch", PackageReference=LQFP100, PackageVersion="Rev. 1, 06/2013", Packing=Tray, PartNumber=STM32F207VGT7
U4: "No Description Available", Built_By=EMA_Jessica, Copyright="Copyright (C) 2018 Accelerated Designs. All rights reserved", Manufacturer_Part_Number=DSC1101CI5-020.0000T, RefDes=RefDes, SourceLibrary=Microchip_2019-08-23_23, Type=DEV, Vendor=Microchip
D2: ComponentLink1Description=Datasheet, ComponentLink1URL=https://www.onsemi.cn/PowerSolutions/document/NUP2105L-D.PDF, ComponentLink2Description=LCSC, ComponentLink2URL=https://lcsc.com/product-detail/TVS_ON-Semiconductor-NUP2105LT1G_C14486.html, ComponentLink3Description=Digikey, ComponentLink3URL=https://www.digikey.com.au/product-detail/en/on-semiconductor/SZNUP2105LT1G/SZNUP2105LT1GOSCT-ND/3487669
U2: ComponentLink1Description=LCSC, ComponentLink1URL=https://lcsc.com/product-detail/CAN-ICs_Texas-Instruments_SN65HVD233DRG4_Texas-Instruments-Texas-Instruments-SN65HVD233DRG4_C61643.html, ComponentLink2Description=Digikey, ComponentLink2URL=https://www.digikey.com.au/product-detail/en/texas-instruments/SN65HVD233DR/296-35967-1-ND/4134960, ComponentLink3Description=Datasheet, ComponentLink3URL=https://www.ti.com/lit/ds/symlink/sn65hvd233.pdf?ts=1588560888178, ComponentLink4Description="Ti Product Page", ComponentLink4URL=https://www.ti.com/product/SN65HVD233

## Via types
v1: diameter 15.75, hole 7.87, Top Layer to Bottom Layer, 112 vias

## Nets (pads, with @x,y where several pads share a name; then routed paths per layer and width w, separated by ;. In a path a pad name is that pad's centre, name@x,y a point inside that pad or via, vN(x,y) a via of type N, cw(c..) or ccw(c..) an arc to the next point about the centre after c; other vN are vias at no path point)
3V3: C3.1 C4.2 C6.2 C7.2 C8.2 C9.2 C10.2 C11.2 C15.2 C16.2 C17.2 C18.2 C19.2 C21.2 C22.2 D4.A J1.1 J3.1 J5.15 J5.16 J5.19 J7.3 J8.3 J9.3 L1.2 L2.1 R14.2 R15.2 R17.2 R18.2 R19.2 R32.1 R33.1 R34.2 R35.2 SD1.4 U2.3 U3.6 U3.11 U3.19 U3.22 U3.28 U3.50 U3.75 U3.100 U4.1 U4.6 | length 2432.2
  Top Layer w5: J5.15 1112.08,2938.96 1112.08,2919.31 1171.39,2860 1196.12,2860 1238.16,2817.96 C22.2 ; U3.75 1689.68,2489.64 1709.63,2469.69 v1(1708.09,2469.69) ; R15.2 1851.5,2806.77 1851.5,2805.41 1858,2798.91 v1(1858,2796) ; v1(2077,2765.61) 2080.59,2769.2 2080.59,2796.69 2110.05,2826.14 U3.50 ; U3.28@2425.37,2532.63 2426.21,2532.63 2471.78,2578.2 C9.2
  Top Layer w10: U2.3 819.93,1294.86 v1(824.8,1290) ; v1(953,1264) 980.85,1264 J1.1 ; v1(1171,2539) 1171,2540.56 1172.73,2542.29 1172.73,2565.26 1182.73,2575.26 C21.2 ; C9.2 2476.78,2605.92 2486.78,2595.92 2486.78,2568.51 2489.28,2566 v1(2489.49,2566)
  Bottom Layer w5: v1(1708.09,2469.69) 1708.09,2557.89 1858,2707.8 v1(1858,2796) 1858.42,2796.42 1862.57,2796.42 1893.38,2765.61 v1(2077,2765.61)
  Bottom Layer w10: v1(824.8,1290) 850.8,1264 v1(953,1264) ; v1(1171,2539) 1171,2105 1176.86,2099.14 1185.14,2099.14 1392.84,2306.84 v1(1506.4,2306.84) ; v1(2489.49,2566) 2596.78,2458.7 v1(2599,2458.7)
12V: C2.2 J6.4 R1.2 R2.2 R3.2 R4.2 R5.2 U1.1 | length 2206
  Top Layer w5: R2.2 1816.52,997.94 R3.2 ; R4.2 R3.2 ; R5.2 C2.2 ; U1.1 2052.1,1010.31 2039.78,997.99 C2.2 ; R3.2 1885.52,997.99 C2.2
  Top Layer w10: R1.2 R2.2
  Top Layer w20: J6.4 411.71,1108.07 530.67,1108.07 929.6,709.14 1737.08,709.14 1771.77,743.83 1771.77,891.77 1811.47,931.46 R1.2
12VP: C1.2 C13.1 C14.1 D1.K R6.2 TP1.1 U1.10 U5.4 U5.5 | length 1388.7
  Top Layer w20: U5.5 U5.4 1449.59,855.83 1462.8,842.62 1462.8,840.23 ; C13.1 C14.1 1462.8,840.23 ; C1.2 1955.7,1294.98 D1.K@1981.46,1269.23 ; v1(2013.6,1199.73) 2011.65,1199.73 1997.21,1214.17 D1.K ; v1(2020,1154.13) 2031.58,1142.55 2045.54,1142.55 ; R6.2@2088.47,1291.99 2065.7,1269.23 D1.K ; 1462.8,840.23 1465.11,842.54 1580.48,842.54 1601.72,863.78 1601.72,928.22 1628.27,954.77 1711.41,954.77 1757.05,1000.41 1757.05,1099.81 TP1.1 1807.47,1156.99 1840.54,1190.06 1840.54,1191.58 1864.72,1215.76 1928,1215.76 D1.K@1981.46,1269.23 ; D1.K@1981.46,1269.23 D1.K
  Bottom Layer w20: v1(2013.6,1199.73) 2013.6,1160.53 v1(2020,1154.13)
B1: J10.2 R32.2 U3.84 | length 2514.2
  Top Layer w5: U3.84@1807.09,2304.09 1808.9,2304.09 1865.4,2360.59 1872.62,2360.59 v1(1874.68,2362.65) ; v1(2317,1472) 2316.63,1413.11 ccw(c2337,1413) 2316.63,1412.95 2318.46,692.04 2432.24,578.26 R32.2
  Top Layer w10: R32.2 J10.2
  Bottom Layer w5: v1(1874.68,2362.65) 1877.2,2362.65 1879.47,2364.91 1906.09,2364.91 1965,2306 1965,1824 2143.53,1645.47 v1(2317,1472)
B2: J12.2 R33.2 U3.85 | length 2855.5
  Top Layer w5: R33.2 601.76,546.76 764.14,709.14 v1(851.73,709.14) ; v1(1645,2101) 1645.19,2101.19 1645.19,2112.55 U3.85
  Top Layer w10: J12.2 601.13,347.63 R33.2
  Bottom Layer w5: v1(851.73,709.14) 955.93,709.14 1096.79,850 1096.79,1396.31 1414.76,1714.28 1537.05,1714.28 1645.37,1822.6 1645.37,2045.85 1645.37,2100.63 v1(1645,2101)
B3: J11.2 R34.1 U3.86 | length 2083.1
  Top Layer w5: U3.86@1839.25,2278.76 1839.4,2278.76 1884.71,2324.07 v1(1884.86,2324.07) ; v1(2346.68,1413.11) 2432.24,1327.55 R34.1
  Top Layer w10: R34.1 2665.86,788.39 J11.2
  Bottom Layer w5: v1(1884.86,2324.07) 1921.88,2324.07 1941,2304.94 1941,1818.37 2346.26,1413.11 v1(2346.68,1413.11)
B4: J13.2 R35.1 U3.87 | length 2560.5
  Top Layer w5: R35.1 600.76,714.51 613.26,727.01 628.06,727.01 655.05,754 v1(813,754) ; v1(1622,1910) 1622,2033.68 U3.87
  Top Layer w10: J13.2 600.39,709.14 R35.1
  Bottom Layer w5: v1(813,754) 974,754 1071,851 1071,1391.73 1408.55,1729.28 1530.84,1729.28 1564.23,1762.67 1564.23,1763.53 1622.74,1822.05 1622.74,1909.26 v1(1622,1910)
BOOT: R16.1 U3.94 | length 291.3
  Top Layer w5: U3.94 1942.04,2157.04 1969.85,2184.85 1980.21,2184.85 2065.48,2099.58 2065.48,2074.8 2065.91,2074.37 2065.91,2057.49 2065.48,2057.06 2065.48,2050.17 R16.1
"BUS SEL": J5.8 U3.69 | length 688.2
  Top Layer w5: J5.8 1249.14,2939.69 1249.14,2916.99 1334.16,2831.97 1518.63,2831.97 U3.69
"BUS STATE": J5.9 U3.70 | length 700.6
  Top Layer w5: J5.9 1229.45,2939.69 1229.45,2915.46 1291.73,2853.18 1308.34,2836.58 1327.95,2816.97 1505.79,2816.97 U3.70
"CAN GLV RX": R12.1 TP4.1 U2.4 U3.95 | length 1746.7
  Top Layer w5: 769.93,1391.96 769.93,1428.01 1128.29,1786.37 1597.41,1786.37 U3.95
  Top Layer w10: TP4.1 690.1,1430.56 R12.1 738.42,1423.47 769.93,1391.96 U2.4
"CAN GLX TX": R11.1 TP6.1 U2.1 U3.96 | length 1614.6
  Top Layer w5: U2.1 938.78,1343.28 957.5,1362 957.5,1370.18 982.77,1395.45 994.19,1395.45 1003.11,1404.37 1019.46,1420.72 1019.46,1428.44 1362.39,1771.37 1610.25,1771.37 U3.96
  Top Layer w10: U2.1 919.93,1393.26 939.14,1412.47 R11.1 990.19,1412.66 TP6.1
"CAN MAIN H": D2.1 J6.3 R13.1 TP5.1 U2.7 | length 903.8
  Top Layer w10: J6.3 574.38,1192.52 734.24,1032.65 861.65,1032.65 D2.1@892.4,1063.4 ; U2.7 869.93,1111.98 876.74,1105.17 885.32,1105.17 892.4,1098.09 D2.1 ; R13.1 970.41,1042.58 913.22,1042.58 D2.1@892.4,1063.4 ; TP5.1 939.23,1065.37 D2.1 ; D2.1@892.4,1063.4 D2.1
"CAN MAIN L": D2.2 J2.1 J6.2 TP3.1 U2.6 | length 778.5
  Top Layer w10: J6.2 548.67,1271.26 TP3.1 754.56,1065.37 D2.2 ; U2.6 819.93,1067.7 D2.2 ; v1(822.22,1009.78) 822.22,964.53 838.75,948 866.73,948 J2.1 ; v1(853.57,1065.37) D2.2
  Bottom Layer w10: v1(822.22,1009.78) 853.57,1041.12 v1(853.57,1065.37)
"CAN MAIN LED": DS5.1 DS6.1 J1.2 | length 499.1
  Top Layer w10: DS6.1@686,1222.29 DS6.1 862.47,1222.29 949.55,1309.37 1022.43,1309.37 1031.22,1300.58 1031.22,1279.37 J1.2@1034.35,1276.23 ; J1.2 J1.2@1034.35,1276.23 ; DS5.1 1049.46,1286.23 1039.46,1276.23 J1.2@1034.35,1276.23
"CAN MAIN RX LED": DS6.2 R12.2 | length 79.2
  Top Layer w10: R12.2 698.38,1359.81 DS6.2
"CAN MAIN TX LED": DS5.2 R11.2 | length 83.3
  Top Layer w10: R11.2 995,1350 1036.96,1391.96 1036.96,1393.26 DS5.2
"CHIP SEL": J5.12 U3.29 | length 1830.6
  Top Layer w5: J5.12 1169.85,3093.85 1203,3127 v1(1954.15,3127) ; v1(1954.15,3076.06) 2085.88,3076.06 2432.33,2729.62 2432.33,2566.39 2402.36,2536.42 U3.29
  Bottom Layer w5: v1(1954.15,3076.06) v1(1954.15,3127)
CLMODE: R7.2 U1.4 | length 118.2
  Top Layer w5: U1.4 2112.43,1017.89 2112.43,999.23 2138.07,973.6 2140.83,973.6 2166.47,947.96 R7.2
DATA/CMD: J5.11 U3.26 | length 1932.8
  Top Layer w5: J5.11 1189.54,3082.54 1219,3112 1940.34,3112 1945.71,3106.63 2127.59,3106.63 2540,2694.22 2540,2584.51 U3.26@2460.74,2505.24 ; U3.26 U3.26@2467.89,2516.69
FLAG: DS2.2 U1.6 | length 316
  Top Layer w5: DS2.2 2005.28,1171.23 2010.68,1176.63 2049.96,1176.63 2073.06,1199.73 2151.8,1199.73 2160.47,1191.06 2160.47,1179.78 v1(2160.7,1179.55) ; U1.6 2131.15,1137.6 v1(2160.7,1137.6)
  Bottom Layer w5: v1(2160.7,1137.6) v1(2160.7,1179.55)
GND: C1.1 C2.1 C3.2 C4.1 C5.1 C6.1 C7.1 C8.1 C9.1 C10.1 C11.1 C13.2 C14.2 C15.1 C16.1 C17.1 C18.1 C19.1 C20.1 C22.1 C23.1 C24.1 C25.1 C26.1 C27.1 C28.1 D1.A D2.3 D3.A D5.K DS3.2 DS4.2 DS9.2 J3.3 J3.5 J3.9 J4.4 J5.17 J6.1 J7.1 J8.1 J9.1 J10.1 J11.1 J12.1 J13.1 P1.3 R7.1 R8.1 R9.1 R10.1 R16.2 R20.1 R22.1 R30.2 R31.1 SD1.6 SD1.9 SD1.10 SD1.11 SD1.12 SW1.1 TP2.1 U1.9 U1.11 U2.2 U3.10 U3.13 U3.20 U3.21 U3.27 U3.74 U4.3 U5.2 | length 5018.1
  Top Layer w5: SD1.12 v1(571.03,1650.33) SD1.11 ; SD1.9 519.98,2191.67 ; J6.1 410.24,1345.76 v1(530.67,1345.76) ; SD1.6 475.98,2024.6 456.33,2024.6 447.2,2033.74 447.2,2118.89 519.98,2191.67 ; SD1.10 v1(550.25,2191.67) 519.98,2191.67 ; v1(768.21,2516.32) 768.47,2516.59 R22.1 ; C17.1 C18.1 ; C26.1 C25.1 C24.1 1126.35,2710.07 ; v1(973.91,2532.21) 974.7,2533 C28.1 ; v1(981.2,1968.05) C18.1 ; C19.1 C18.1 ; J5.17 1072.71,2938.96 1072.71,2917.25 1079.5,2910.46 v1(1079.5,2907.55) ; v1(1126.7,2738.54) 1126.35,2738.18 1126.35,2710.07 ; R31.1 1266.11,2575.26 1278.61,2562.76 1278.61,2557.76 1306.23,2530.14 1306.23,2508.12 D5.K 1290.48,2457.37 v1(1283.06,2457.37) ; v1(1286,894.01) 1286.77,893.24 U5.2 ; C20.1 C22.1 C23.1 1126.35,2710.07 ; C27.1 1405.27,2527.14 v1(1422.02,2510.39) ; R30.2 1494.78,2732.36 v1(1495.18,2732.76) ; v1(1586.8,2660.92) 1601.5,2646.22 1601.5,2630 1614,2617.5 C10.1 ; U3.74 1704.66,2507.81 1737.84,2474.63 v1(1738.89,2474.63) ; SW1.1 v1(1776.03,1651.81) 1803.26,1679.04 C5.1 ; v1(2028.47,1078.23) U1.11 U1.11@2071.78,1097.91 ; C4.1 2085.88,2905.91 2085.88,2906.09 v1(2085.99,2906.2) ; U1.9 2073.06,1138.56 2073.06,1157.22 2073.49,1157.66 2073.49,1161.8 v1(2071.82,1163.47) ; v1(2113.44,1959.77) 2113.44,1939.73 R16.2 ; v1(2202.22,2231.9) U3.10 ; v1(2243.03,2273.72) 2243.75,2273 2244,2273 2245.64,2271.36 2246.28,2271.36 U3.13 ; C6.1 v1(2304.92,2101) ; v1(2349,2372.64) 2349,2372.09 2353.64,2367.45 2353.64,2358.87 U3.20 U3.21 ; U3.27 2453.48,2531.09 v1(2463.3,2540.91) ; v1(2471.78,2647) C9.1 ; v1(2494.49,2294.74) 2494.61,2294.87 C8.1 ; C7.1 C7.1@2530.24,2002
  Top Layer w10: J13.1 v1(508,787.88) ; J12.1 507.37,426.37 v1(508,427) ; J4.4@420.28,2623.95 420.43,2624.1 479.43,2624.1 v1(479.57,2624.25) 479.87,2623.95 J4.4@571.03,2623.95 ; D2.3 855,988.6 875.3,1008.9 877.9,1008.9 v1(879,1010) ; C3.2 878.54,1370.59 869.93,1361.98 U2.2 869.93,1324.58 888,1306.51 v1(888,1306) ; J9.1 v1(1010.99,573) ; DS9.2 1228.19,796.76 R20.1 1241.1,783.86 v1(1281.51,783.86) ; C16.1 1321.19,1244.99 ; v1@1282,783 1283,783 1286,780 C14.2 ; v1(1321.55,1211.33) 1321.19,1211.69 1321.19,1244.99 ; C15.1 1321.19,1244.99 ; J8.1 v1(1438.4,573) ; C13.2 1680.46,798.19 v1(1680.46,840.23) D3.A ; D1.A 1855,1269.23 1883.47,1297.69 1883.47,1320.88 v1(1884.86,1322.27) 1884.86,1359.86 C1.1 ; J7.1 v1(1858.99,573) ; DS3.2 1943.47,1098.07 v1(1950.52,1091.02) 1954.47,1087.07 C2.1 ; C11.1 R16.2 ; v1(2058.94,1222) 2069.16,1232.23 R10.1 ; v1(2098.47,796.76) 2081.7,779.99 TP2.1 2028.92,863.54 R8.1 2165.47,863.99 R7.1 ; DS4.2 2160.7,1282.3 v1(2162,1281) ; U4.3 v1(2514.34,2038.1) 2514.34,2017.9 C7.1@2530.24,2002 ; v1(2538,347) 2538.63,347.63 J10.1 ; v1(2538,709) 2538.14,709.14 J11.1
  Bottom Layer w10: v1(1281.51,783.86) 1281.51,783.49 v1@1282,783
NetC20_2: C20.2 J5.5 | length 277.7
  Top Layer w5: v1(1279,2827.95) 1280.56,2826.4 1294.37,2826.4 1312.7,2808.07 C20.2 ; v1(1279,2974) 1279.84,2973.16 1294.37,2973.16 1306.37,2961.16 1306.37,2941.52 J5.5
  Bottom Layer w5: v1(1279,2827.95) v1(1279,2974)
NetC21_1: C21.1 D5.A D6.K | length 293.4
  Top Layer w5: D6.K 1093.24,2637.74 1192.73,2637.74 1212.73,2617.74 1212.73,2612.23 1220.23,2604.73 1220.23,2527.12 1193.73,2500.62 D5.A
NetC23_2: C23.2 J5.18 | length 217
  Top Layer w5: J5.18 1051.74,2879.42 1158.62,2772.54 C23.2
NetC24_2: C24.2 J5.20 | length 199.5
  Top Layer w5: J5.20 1012.37,2895.01 1089.08,2818.3 C24.2
NetC25_2: C25.2 J5.22 | length 184.9
  Top Layer w5: J5.22 973,2877.42 1014.54,2835.89 C25.2
NetC26_2: C26.2 J5.24 | length 170.3
  Top Layer w5: J5.24 933.63,2859.84 940,2853.47 C26.2
NetC27_2: C27.2 D4.K J5.21 | length 1759.8
  Top Layer w5: J5.21 992.69,2985.47 889.6,3088.56 818.22,3088.56 777.43,3047.78 777.43,2781.83 884.42,2674.84 884.42,2534.67 918.59,2500.5 1021.41,2500.5 1037.24,2516.32 1037.24,2649.41 1053.06,2665.24 1212.91,2665.24 1227.73,2650.41 1227.73,2618.44 1235.94,2610.24 1297.17,2610.24 1300.1,2607.31 1300.1,2590.23 1387.77,2502.56 1387.77,2487.76 1400.27,2475.26 C27.2 1417.77,2487.76 1429.54,2487.76 1442.28,2500.5 D4.K
NetC28_2: C28.2 D6.A J5.23 | length 486.2
  Top Layer w5: C28.2 946,2540.24 D6.A 946,2630.5 907.5,2669 907.5,2730.25 918.56,2741.31 961.44,2741.31 972.5,2752.37 972.5,2842.18 953.32,2861.37 J5.23
NetDS1_1: DS1.1 R1.1 | length 58.6
  Top Layer w10: DS1.1 1816.47,813.23 R1.1
NetDS2_1: DS2.1 R2.1 | length 142.2
  Top Layer w10: R2.1 1816.47,1090.46 1844.97,1118.96 1844.97,1138.94 1859.76,1153.73 1865.97,1153.73 DS2.1
NetDS3_1: DS3.1 R3.1 | length 61.6
  Top Layer w5: DS3.1 1883.47,1062.41 R3.1
NetDS4_1: DS4.1 R6.1 | length 63.8
  Top Layer w10: R6.1 2156.94,1364.46 DS4.1
NetDS7_1: DS7.1 R14.1 | length 68.7
  Top Layer w5: DS7.1 1705.25,2779.33 R14.1 R14.1@1742.88,2823.48
NetDS8_1: DS8.1 R15.1 | length 70.5
  Top Layer w5: R15.1 1791.42,2871.36 DS8.1 DS8.1@1839.85,2913.83
NetDS9_1: DS9.1 R19.1 | length 63.6
  Top Layer w10: R19.1 1174.96,907.64 DS9.1
NetJ2_2: J2.2 R13.2 | length 118.8
  Top Layer w10: J2.2 979.99,883 R13.2
NetJ5_2: J5.2 Q1.2 R30.1 | length 285.7
  Top Layer w5: J5.2 1366.7,2919.03 1375.83,2909.9 v1(1405.63,2909.9) ; Q1.2 1433.99,2788.3 1440.74,2781.55 1447.04,2781.55 1450.09,2778.5 v1(1453,2778.5) 1488.83,2778.5 R30.1
  Bottom Layer w5: v1(1405.63,2909.9) 1431,2884.53 1431,2799 1451.5,2778.5 v1(1453,2778.5)
NetJ5_3: J5.3 Q1.3 R31.2 | length 417.2
  Top Layer w5: R31.2 1273.61,2650.24 1296.19,2650.24 1316.02,2670.06 1325.37,2670.06 1380.04,2724.73 v1(1380.04,2750.39) 1380.04,2778.5 ; J5.3 1347.02,2909.9 v1(1348.68,2908.24)
  Bottom Layer w5: v1(1348.68,2908.24) 1348.68,2773.32 1371.61,2750.39 v1(1380.04,2750.39)
NetL2_2: L2.2 Q1.1 | length 113.7
  Top Layer w5: L2.2 1353.32,2640.27 1353.32,2654.15 1393.55,2694.38 1398.88,2694.38 1405.63,2701.13 1405.63,2703.69
NRST: C5.2 J3.10 R17.1 SW1.2 U3.14 | length 1529.3
  Top Layer w5: SW1.2 1560.99,1561.76 J3.10 1755.79,1508.52 1803.02,1555.76 R17.1 1808.02,1616.33 C5.2 1908.04,1616.57 2221.23,1929.76 v1(2221.23,2060) ; v1(2141,2265) 2170.1,2294.1 2251.47,2294.1 2291,2254.57 U3.14
  Bottom Layer w5: v1(2141,2265) 2141,2140.23 v1(2221.23,2060)
"ORANGE LED 1": DS7.2 U3.64 | length 141.3
  Top Layer w5: DS7.2 1752.89,2736.91 1787.35,2703.41 cw(c1773.2,2688.76) 1787.6,2703.16 1819.99,2670.77 U3.64
"ORANGE LED 2": DS8.2 U3.63 | length 243.4
  Top Layer w5: U3.63 1856.71,2662.73 1828.9,2690.54 1828.9,2738.09 1878.37,2787.56 1878.37,2817.85 1876.31,2819.91 DS8.2
"OSC IN": U3.12 U4.4 | length 290.9
  Top Layer w5: U3.12 2305.97,2183.83 2476.89,2183.83 2497.31,2163.41 2497.31,2155.73 2511.54,2141.5 U4.4
OVLO: R5.1 R9.2 U1.3 | length 262.6
  Top Layer w5: R5.1 1966.97,881.49 1993.29,881.49 2009.03,897.23 2064.23,897.23 2092.47,925.46 R9.2 2097.47,970.08 2091.47,976.08 U1.3
POT-L: J7.2 U3.15 | length 2761.4
  Top Layer w5: U3.15 2356.84,2216.47 2566.91,2216.47 v1(2598.5,2184.88)
  Top Layer w10: J7.2 1937.73,331.27 1949.8,319.2 2241.06,319.2 2252,330.14 2252,1582.39 2598.5,1928.9 v1(2598.5,1953)
  Bottom Layer w10: v1(2598.5,1953) v1(2598.5,2184.88)
POT-M: J8.2 U3.16 | length 3264.5
  Top Layer w5: U3.16 2369.68,2231.47 2580.72,2231.47 2622.2,2190 2622.2,2186.93 v1(2624.25,2184.88)
  Top Layer w10: J8.2 1517.14,310.14 1528.08,299.2 2261.06,299.2 2272,310.14 2272,1574.11 2624.25,1926.36 v1(2624.25,1953)
  Bottom Layer w10: v1(2624.25,1953) v1(2624.25,2184.88)
POT-R: J9.2 U3.17 | length 3768.4
  Top Layer w5: U3.17 2382.52,2246.47 2591.47,2246.47 2647.94,2190 2647.94,2186.93 v1(2650,2184.88)
  Top Layer w10: J9.2 1089.73,290.14 1100.67,279.2 2275.2,279.2 2292,296 2292,1565.83 2650,1923.83 v1(2650,1953)
  Bottom Layer w10: v1(2650,1953) v1(2650,2184.88)
"PWR CB 3V3": C12.1 U5.1 | length 77.7
  Top Layer w10: U5.1 1335.67,964.71 1362.96,992 C12.1
"PWR FB 3V3": R18.1 R20.2 U5.3 | length 167.5
  Top Layer w10: R18.1 1234.96,852.47 R20.2 1240.32,855.83 U5.3
"PWR SW 3V3": C12.2 D3.K L1.1 U5.6 | length 296.4
  Top Layer w10: C12.2 1426.24,996.19 U5.6 1477.75,930.64 1488.51,941.41 1488.51,984.57 1518.95,1015 L1.1
RESET: J5.10 U3.25 | length 1723.5
  Top Layer w5: J5.10 1209.22,3068.06 1238.16,3097 1790,3097 2053,2834 2053,2824.73 2065.48,2812.25 2065.48,2796.66 2054.8,2785.98 2054.8,2739.39 2354.56,2439.63 2412.07,2439.63 U3.25
SD_CMD: SD1.3 U3.83 | length 1475.5
  Top Layer w5: SD1.3 1358.4,1881.43 U3.83
SD_D0: SD1.7 U3.65 | length 1693.2
  Top Layer w5: SD1.7 1174.45,2054.66 1484.71,2364.91 v1(1483.01,2364.91) ; v1(1773.2,2688.76) 1775.25,2686.7 1778.28,2686.7 1795.63,2669.36 1795.63,2666.33 U3.65
  Bottom Layer w5: v1(1483.01,2364.91) 1519.95,2401.85 1519.95,2508.85 1699.87,2688.76 v1(1773.2,2688.76)
SD_D1: SD1.8 U3.66 | length 1635.9
  Top Layer w5: SD1.8 1182,2097.97 v1(1422.02,2337.99) ; v1(1775.25,2660.92) 1786.13,2650.05 1786.13,2649.8 1814.96,2620.97 U3.66
  Bottom Layer w5: v1(1422.02,2337.99) 1484.9,2337.99 1534.95,2388.04 1534.95,2487.95 1707.92,2660.92 v1(1775.25,2660.92)
SD_D2: SD1.1 U3.78 | length 1521.8
  Top Layer w5: SD1.1 v1(1038.18,1794.82) ; v1(1284,2128) 1465.77,2128 U3.78
  Bottom Layer w5: v1(1038.18,1794.82) 1038.18,1881.18 1284,2127 v1(1284,2128)
SD_D3: SD1.2 U3.79 | length 1461.5
  Top Layer w5: SD1.2 1076.36,1838.13 v1(1093.24,1855) ; v1(1334,2097) 1462.61,2097 U3.79
  Bottom Layer w5: v1(1093.24,1855) 1093.24,1855.62 1334,2096.38 v1(1334,2097)
SDIO_CK: SD1.5 U3.80 | length 1426.6
  Top Layer w5: SD1.5 503.01,1968.05 518.07,1983.11 523.93,1983.11 531.26,1990.43 531.26,2010.08 554.86,2033.68 1427.13,2033.68 U3.80
"SERIAL CLK": J5.13 U3.30 | length 1867.6
  Top Layer w5: J5.13 1150.17,3099.95 1196.12,3145.91 1197.59,3147.37 1962.59,3147.37 1965.52,3144.44 v1(1983.93,3144.44) ; v1(1983.93,3042.6) 2098.13,3042.6 2417.33,2723.4 2417.33,2580.27 2388.44,2551.37 U3.30
  Bottom Layer w5: v1(1983.93,3042.6) v1(1983.93,3144.44)
"SERIAL DATA": J5.14 U3.31 | length 1901.3
  Top Layer w5: J5.14 1130.48,3101.48 1191.37,3162.37 2014.84,3162.37 v1(2016.47,3164) ; v1(2016,3008) 2111.52,3008 2402.33,2717.19 2402.33,2593.1 2374.52,2565.29 U3.31
  Bottom Layer w5: v1(2016,3008) 2016,3163.53 v1(2016.47,3164)
SETI: R10.2 U1.8 | length 129.9
  Top Layer w5: U1.8 2091.47,1157.47 2100.73,1166.73 v1(2100.73,1174.33) ; v1(2133,1222) 2146.48,1222 R10.2
  Bottom Layer w5: v1(2100.73,1174.33) 2100.73,1189.73 v1(2133,1222)
SWCLK: J3.4 U3.76 | length 992.5
  Top Layer w5: J3.4 1464.23,1625.23 1523.75,1684.75 v1(1523.75,1751) ; v1(1625,2343) U3.76@1689.63,2407.59
  Bottom Layer w5: v1(1523.75,1751) 1523.75,2241.75 v1(1625,2343)
SWDIO: J3.2 U3.72 | length 1211
  Top Layer w5: J3.2 1414.23,1617.23 1498,1701 v1(1498,1751) ; v1(1610.25,2367.45) 1692.11,2449.32 1705.38,2449.32 1742.4,2449.32 1759.27,2466.19 1759.27,2506.01 1731.44,2533.84 U3.72
  Bottom Layer w5: v1(1498,1751) 1498,2255.21 v1(1610.25,2367.45)
"TEMP CLK": J5.6 U3.67 | length 663.3
  Top Layer w5: J5.6 1289.24,2938.96 1289.24,2919.31 1346.59,2861.97 1537.69,2861.97 1596.85,2802.81 1601.17,2802.81 1687.64,2716.34 1689.94,2716.34 U3.67
"TEMP DATA": J5.7 U3.68 | length 675.8
  Top Layer w5: J5.7 1269.56,2938.96 1269.56,2917.78 1340.37,2846.97 1531.47,2846.97 U3.68
USART3_RX: P1.2 U3.48 | length 1004.3
  Top Layer w5: U3.48 2107.72,2769.95 2106.26,2768.48 2106.26,2764.34 2106.37,2745.12 cw(c2085.99,2745) 2106.37,2744.85 2106.26,2729.67 2106.26,2725.53 2107.72,2724.07 2360.94,2470.84 2360.94,2462.06 v1(2363,2460)
  Top Layer w10: v1(2521,2441) 2522.1,2442.1 2526.16,2442.1 2679.89,2595.83 2679.89,2687.05 P1.2
  Bottom Layer w5: v1(2363,2460) 2384,2439 2519,2439 v1(2521,2441)
USART3_TX: P1.1 U3.47 | length 770.1
  Top Layer w5: U3.47 2121.45,2755.84 2121.45,2731.55 v1(2393,2460)
  Top Layer w10: v1(2473,2460) 2474.1,2461.1 2474.1,2470.31 P1.1
  Bottom Layer w5: v1(2393,2460) v1(2473,2460)
"USB DM": R24.2 U3.53 | length 1646.7
  Top Layer w5: R24.2 764.47,2603 776.97,2590.5 781.97,2590.5 942.65,2429.82 1538.44,2429.82 1543.82,2435.19 v1(1558.47,2435.19) ; v1(1892,2475) 1940.94,2474.86 1949.37,2474.86 1956.27,2481.76 ccw(c1952.74,2485.3) 1956.45,2481.95 2024.8,2557.82 2024.8,2769.41 1995.91,2798.3 U3.53
  Bottom Layer w5: v1(1558.47,2435.19) 1821.04,2435.19 1860.85,2475 v1(1892,2475)
"USB DP": R23.2 U3.54 | length 1554.2
  Top Layer w5: R23.2 930.05,2400 930.23,2399.82 1540.6,2399.82 1544.69,2395.72 1556.41,2395.72 v1(1558.47,2393.67) ; v1(1940.97,2495.27) v1(1940.97,2495.27) 2009.8,2564.04 2009.8,2756.57 1981.99,2784.38 U3.54
  Bottom Layer w5: v1(1558.47,2393.67) 1559.06,2394.26 1586.94,2394.45 1840.26,2394.45 1912.37,2466.56 ; 1912.37,2466.61 1940.97,2495.2 v1(1940.97,2495.27)
"USB M": J4.3 R24.1 | length 313
  Top Layer w10: J4.3@420.28,2545.21 571.03,2545.21 618.28,2545.21 634.93,2561.87 634.93,2570.93 672,2608 R24.1
"USB P": J4.2 R23.1 | length 315.9
  Top Layer w10: J4.2@420.28,2466.47 571.03,2466.47 618.28,2466.47 654.93,2429.82 654.93,2415.07 670,2400 R23.1
USB_D6: R21.1 R22.2 U3.52 | length 1703.5
  Top Layer w5: R22.2 876.74,2474.52 936.44,2414.82 v1(1586.8,2414.82) ; v1(1854.92,2440.26) 1935.98,2440.26 1967.25,2471.52 2038.51,2550.18 2039.8,2551.61 2039.8,2783.29 2009.83,2813.26 U3.52
  Top Layer w10: R21.1 768.21,2474.26 R22.2
  Bottom Layer w5: v1(1586.8,2414.82) 1829.48,2414.82 v1(1854.92,2440.26)
UVLO: R4.1 R8.2 U1.2 | length 280.4
  Top Layer w5: R4.1 1890.47,868.99 1925.44,903.96 1979.65,903.96 2002.15,926.46 R8.2 2033.47,926.46 2071.78,964.78 U1.2
UVOV: DS1.2 U1.7 | length 817
  Top Layer w5: U1.7 2112.43,1138.56 2112.43,1157.22 2119.76,1164.55 2141.92,1164.55 2148.5,1157.97 2169.14,1157.97 2201.47,1125.65 2201.47,1108.54
  Top Layer w10: DS1.2 1941.24,811.23 2019.47,733 2092.69,733 2186.19,826.5 2201.47,841.78 2201.47,1108.54
VUSB: J4.1 R21.2 | length 557.4
  Top Layer w10: J4.1@420.28,2387.73 571.03,2387.73 618.28,2387.73 641.01,2365 721.21,2365 730,2373.79 730,2426.21 716.58,2439.63 673.42,2439.63 660,2453.05 660,2506.73 690,2536.73 R21.2
pads on no net: FID1.1 FID2.1 FID3.1 FID4.1 J3.6 J3.7 J3.8 J4.M J5.1 J5.4 J5.MP1 J5.MP2 J6.5 J6.6 J7.4 J7.5 J8.4 J8.5 J9.4 J9.5 J10.3 J10.4 J11.3 J11.4 J12.3 J12.4 J13.3 J13.4 M1.1 M2.1 M3.1 M4.1 U1.5 U2.5 U2.8 U3.1 U3.2 U3.3 U3.4 U3.5 U3.7 U3.8 U3.9 U3.18 U3.23 U3.24 U3.32 U3.33 U3.34 U3.35 U3.36 U3.37 U3.38 U3.39 U3.40 U3.41 U3.42 U3.43 U3.44 U3.45 U3.46 U3.49 U3.51 U3.55 U3.56 U3.57 U3.58 U3.59 U3.60 U3.61 U3.62 U3.71 U3.73 U3.77 U3.81 U3.82 U3.88 U3.89 U3.90 U3.91 U3.92 U3.93 U3.97 U3.98 U3.99 U4.2 U4.5

## Polygon pours and split planes (outlines as drawn)
GND on Bottom Layer "GND_L02_P001" (solid, pour order 1): 235,3225 2800,3225 2800,198 235,198
3V3 on Top Layer "Top Layer-3V3" (solid, remove dead copper, pour order 4): 235,3225 2800,3225 2800,198 235,198

## Silkscreen, mask and mechanical layers (free items; w line width, h text height)
Bottom Overlay:
  text "QUTMS Steering Wheel Board V01 / Designed by Jarrod Fisher" at 2452,1853 h60
Mechanical 1:
  lines w10: 210,3246 210,3248 ; 212,173 210,173 ; 212,3248 210,3248 ; 210,173 210,3248 ; 210,173 2825,173 2825,3248 210,3248

## Text inside footprints (layer, text, board x,y; h text height)
J4: Top Overlay "1" at 470.28,2325.84 h40 r90; Top Overlay "4" at 475.28,2660.84 h40 r90; Top Overlay "PH x4 COMB" at 321.28,2648.51 h29.53 r270; Top Overlay "1" at 678.38,2315.45 h40 r90; Top Overlay "4" at 678.78,2667.6 h40 r90